# EAGLE board g - HomeAutomation (EAGLE 9.1.1)
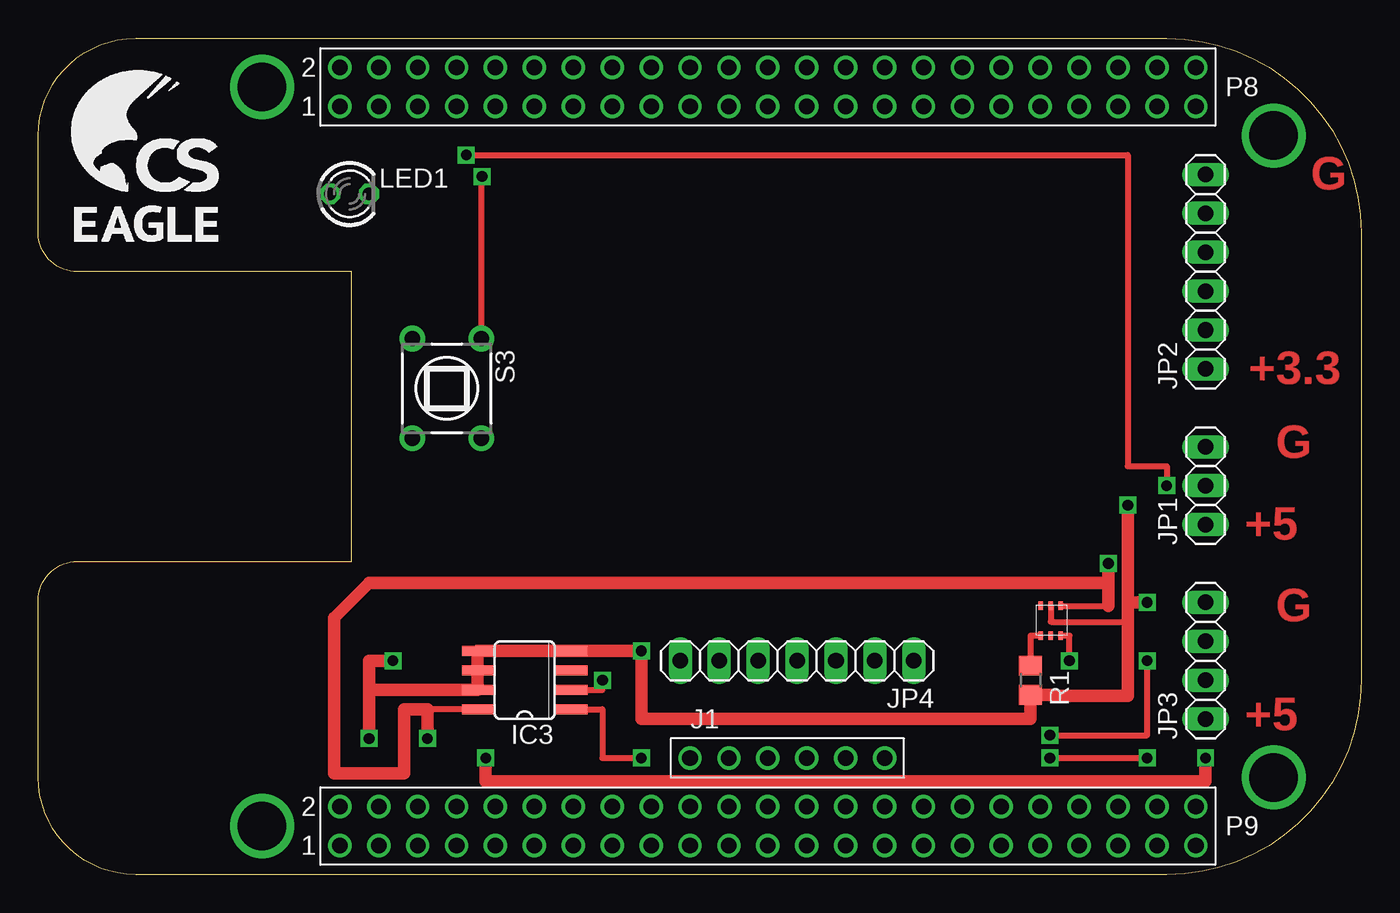
[diagram p0: board, top side]
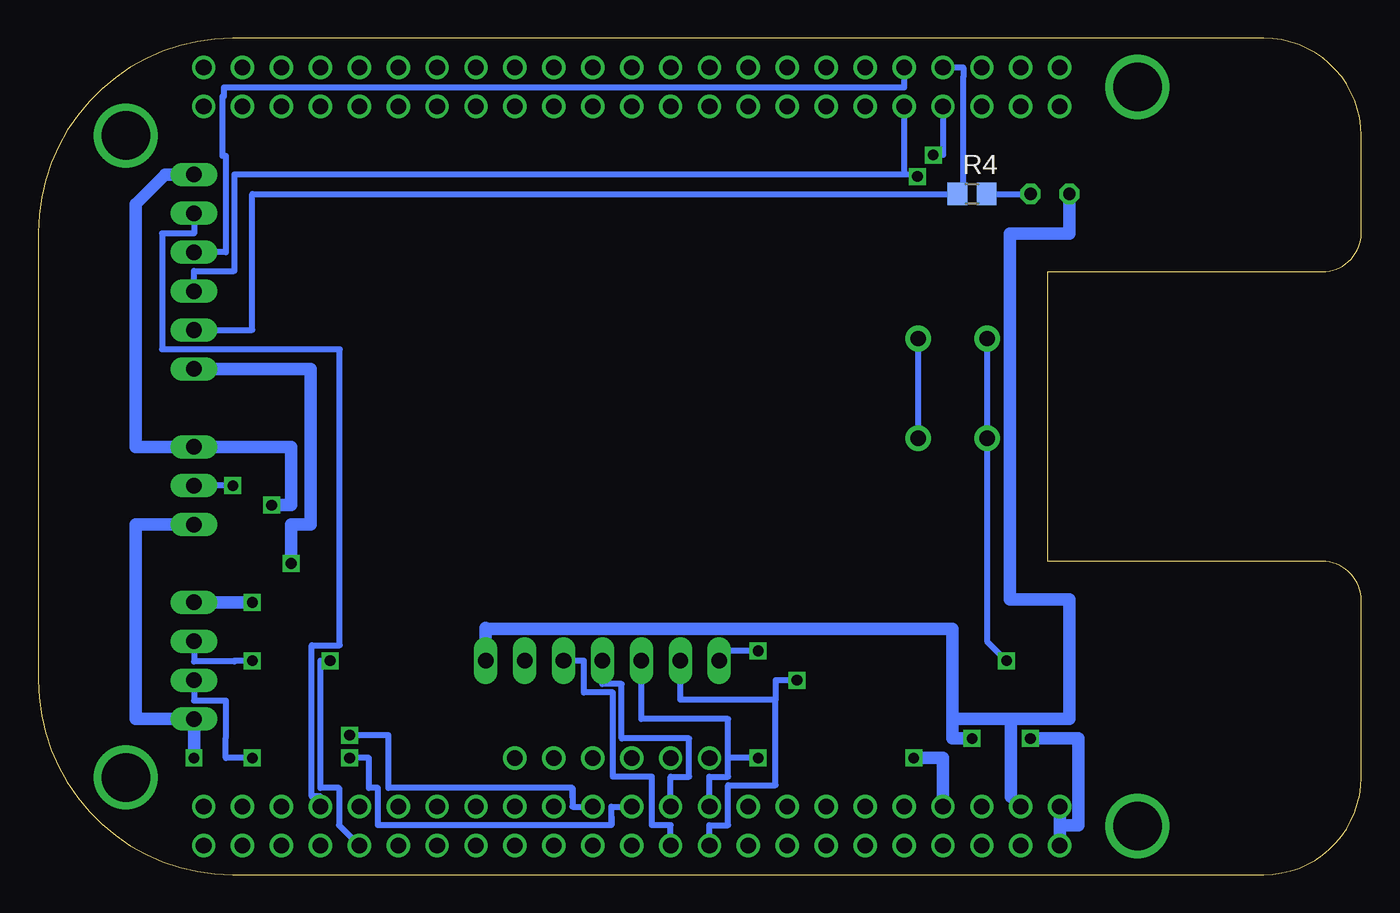
[diagram p1: board, bottom side, seen from below]

Size 86.36 x 54.61 mm. Coordinates in mm from the lower left corner, seen from the top.
Copper layers (1*16): Top 0.035mm / dielectric 1.5mm / Bottom 0.035mm
Design rules "default": minimum track width 6mil, minimum drill 0.35mm, track to track 6mil, track to pad 6mil, pad to pad 6mil, via to via 6mil, smd to smd 6mil, copper to edge 40mil, drill to drill 6mil, minimum pad ring 10mil, minimum via ring 8mil, stop-mask expansion 4mil, vias tented up to drill 0mil, thermal gap 10mil

## Footprints (pad centres in the part's own frame; a part is rotated, then mirrored left to right if it is on the bottom)
SO08 = smd 0.66 x 2.032: 1 -1.905,-3.073; 2 -0.635,-3.073; 3 0.635,-3.073; 4 1.905,-3.073; 5 1.905,3.073; 6 0.635,3.073; 7 -0.635,3.073; 8 -1.905,3.073
1X03 = drill 1.016 long: 1 -2.54,0; 2 0,0; 3 2.54,0
1X06 = drill 1.016 long: 1 -6.35,0; 2 -3.81,0; 3 -1.27,0; 4 1.27,0; 5 3.81,0; 6 6.35,0
1X04 = drill 1.016 long: 1 -3.81,0; 2 -1.27,0; 3 1.27,0; 4 3.81,0
1X07 = drill 1.016 long: 1 -7.62,0; 2 -5.08,0; 3 -2.54,0; 4 0,0; 5 2.54,0; 6 5.08,0; 7 7.62,0
LED3MM = drill 0.813 octagon: A -1.27,0; K 1.27,0
BEAGLEBONE_BLACK_CAPE = drill 3.175: H1 14.605,3.175; H2 80.645,6.35; H3 80.645,48.26; H4 14.605,51.435 | drill 1.016: J1.1 42.545,7.62; J1.2 45.085,7.62; J1.3 47.625,7.62; J1.4 50.165,7.62; J1.5 52.705,7.62; J1.6 55.245,7.62; P8.1 19.685,50.165; P8.2 19.685,52.705; P8.3 22.225,50.165; P8.4 22.225,52.705; P8.5 24.765,50.165; P8.6 24.765,52.705; P8.7 27.305,50.165; P8.8 27.305,52.705; P8.9 29.845,50.165; P8.10 29.845,52.705; P8.11 32.385,50.165; P8.12 32.385,52.705; P8.13 34.925,50.165; P8.14 34.925,52.705; P8.15 37.465,50.165; P8.16 37.465,52.705; P8.17 40.005,50.165; P8.18 40.005,52.705; P8.19 42.545,50.165; P8.20 42.545,52.705; P8.21 45.085,50.165; P8.22 45.085,52.705; P8.23 47.625,50.165; P8.24 47.625,52.705; P8.25 50.165,50.165; P8.26 50.165,52.705; P8.27 52.705,50.165; P8.28 52.705,52.705; P8.29 55.245,50.165; P8.30 55.245,52.705; P8.31 57.785,50.165; P8.32 57.785,52.705; P8.33 60.325,50.165; P8.34 60.325,52.705; P8.35 62.865,50.165; P8.36 62.865,52.705; P8.37 65.405,50.165; P8.38 65.405,52.705; P8.39 67.945,50.165; P8.40 67.945,52.705; P8.41 70.485,50.165; P8.42 70.485,52.705; P8.43 73.025,50.165; P8.44 73.025,52.705; P8.45 75.565,50.165; P8.46 75.565,52.705; P9.1 19.685,1.905; P9.2 19.685,4.445; P9.3 22.225,1.905; P9.4 22.225,4.445; P9.5 24.765,1.905; P9.6 24.765,4.445; P9.7 27.305,1.905; P9.8 27.305,4.445; P9.9 29.845,1.905; P9.10 29.845,4.445; P9.11 32.385,1.905; P9.12 32.385,4.445; P9.13 34.925,1.905; P9.14 34.925,4.445; P9.15 37.465,1.905; P9.16 37.465,4.445; P9.17 40.005,1.905; P9.18 40.005,4.445; P9.19 42.545,1.905; P9.20 42.545,4.445; P9.21 45.085,1.905; P9.22 45.085,4.445; P9.23 47.625,1.905; P9.24 47.625,4.445; P9.25 50.165,1.905; P9.26 50.165,4.445; P9.27 52.705,1.905; P9.28 52.705,4.445; P9.29 55.245,1.905; P9.30 55.245,4.445; P9.31 57.785,1.905; P9.32 57.785,4.445; P9.33 60.325,1.905; P9.34 60.325,4.445; P9.35 62.865,1.905; P9.36 62.865,4.445; P9.37 65.405,1.905; P9.38 65.405,4.445; P9.39 67.945,1.905; P9.40 67.945,4.445; P9.41 70.485,1.905; P9.42 70.485,4.445; P9.43 73.025,1.905; P9.44 73.025,4.445; P9.45 75.565,1.905; P9.46 75.565,4.445
R0805 = smd 1.3 x 1.5: 1 -0.95,0; 2 0.95,0
TL1105SP = drill 1 pad 1.676: 1 -2.25,-3.25; 2 -2.25,3.25; 3 2.25,-3.25; 4 2.25,3.25
ODFN6 = smd 0.55 x 0.3: P$1 -1.046,0.7; P$2 -1.046,0.05; P$3 -1.046,-0.6; P$4 0.904,-0.6; P$5 0.904,0.05; P$6 0.904,0.7

## Placement (x,y rotation side)
IC3  DS1621S  [SO08]  31.75,12.7 90 top
JP1  [1X03]  76.2,25.4 90 top
JP2  [1X06]  76.2,39.37 90 top
JP3  [1X04]  76.2,13.97 90 top
JP4  [1X07]  49.53,13.97 180 top
LED1  [LED3MM]  20.32,44.45 0 top
PCB1  BEAGLEBONE_BLACK_CAPE  [BEAGLEBONE_BLACK_CAPE]  0,0 0 top
R1  100k  [R0805]  64.77,12.7 270 top
R4  86  [R0805]  25.4,44.45 0 bottom
S3  [TL1105SP]  26.67,31.75 180 top
U$1  ISL29101  [ODFN6]  66.04,16.51 270 top

## Library data of the parts
IC3 = maxim
JP1-JP4 = pinhead
LED1 S3 = SouthernConn
PCB1 = e14_BeagleBoneBlack_RevB
R1 = rclb; SPICEPREFIX: R
R4 = rcl
U$1 = mdant

## Nets
+3V3: IC3.8 JP2.1 JP4.1 LED1.A PCB1.P9.4 U$1.P$1
+5V: JP1.1 JP3.1 PCB1.P9.8
AIN1: JP2.5 PCB1.P9.40
AIN2: PCB1.P9.37 U$1.P$6
GND: IC3.4 IC3.5 IC3.6 IC3.7 JP1.3 JP2.6 JP3.4 JP4.7 PCB1.P9.1 PCB1.P9.2 R1.2 S3.3 S3.4 U$1.P$2
GPIO0_66: JP1.2 PCB1.P8.7
GPIO0_67: JP2.2 PCB1.P8.8 R4.1
GPIO0_68: JP2.4 PCB1.P8.10
GPIO0_69: JP2.3 PCB1.P8.9 S3.1 S3.2
I2C2_SCL: IC3.2 JP4.6 PCB1.P9.19
I2C2_SDA: IC3.1 JP4.5 PCB1.P9.20
N$1: R1.1 U$1.P$4
N$13: LED1.K R4.2
SPI0_CS0: JP4.2
SPIO_CS0: PCB1.P9.17
SPIO_D0: JP4.3 PCB1.P9.21
SPIO_SCLK: JP4.4 PCB1.P9.22
UART1_RXD: JP3.3 PCB1.P9.26
UART1_TXD: JP3.2 PCB1.P9.24

## Tracks (layer width: path | path; a pad name or v marks a point on that pad's centre or on a via)
+3V3  (via drill 0.7)
  Top 0.406: IC3.8 25.4,10.79 | U$1.P$1 69.85,17.56
  Top 0.813: 69.85,19.05 21.59,19.05 19.31,16.77 19.31,6.61 23.87,6.61 23.87,10.79 25.4,10.79 v25.4,8.89 | 69.85,19.05 v69.85,20.32 | 69.85,17.56 69.85,19.05
  Bottom 0.813: 22.86,10.16 19.05,10.16 19.05,17.96 22.94,17.96 22.94,41.86 19.05,41.86 LED1.A | 22.86,10.16 26.67,10.16 | v69.85,20.32 69.85,22.86 68.58,22.86 68.58,33.02 JP2.1 | 26.67,10.16 26.67,16.05 57.1,16.05 57.15,16.1 JP4.1 | PCB1.P9.4 22.86,5.08 22.86,10.16 | 26.67,10.16 26.67,8.89 v25.4,8.89
+5V  (via drill 0.7)
  Top 0.813: v29.21,7.62 29.21,6.1 76.2,6.1 v76.2,7.62
  Bottom 0.813: PCB1.P9.8 27.3,7.62 v29.21,7.62 | v76.2,7.62 JP3.1 80.01,10.16 80.01,17.78 80.01,22.86 JP1.1
AIN1
  Bottom 0.406: JP2.5 76.2,41.86 78.28,41.86 78.28,34.29 68.58,34.29 67.94,34.29 66.67,34.29 66.67,14.98 68.5,14.98 68.5,5.11 67.94,5.11 PCB1.P9.40
AIN2  (via drill 0.7)
  Top 0.406: v67.31,13.97 67.31,15.61 U$1.P$6
  Bottom 0.406: v67.31,13.97 67.94,13.97 67.94,5.66 66.73,5.66 66.73,3.23 PCB1.P9.37
GND  (via drill 0.7)
  Top 0.406: 66.3,11.75 66.3,11.69 | U$1.P$2 66.09,16.51 71.12,16.51
  Top 0.813: v71.12,24.13 71.12,17.78 | 71.12,17.78 v72.39,17.78 | 66.3,11.75 R1.2 64.77,10.16 39.37,10.16 v39.37,14.61 IC3.4 IC3.5 IC3.6 IC3.7 21.59,12.06 | 66.3,11.69 71.12,11.69 71.12,16.51 71.12,17.78 | v21.59,8.89 21.59,12.06 | 21.59,12.06 21.59,13.97 v23.15,13.97
  Bottom 0.406: 78.09,45.72 78.09,45.71 | v39.37,14.61 41.91,14.61 JP4.7 | S3.3 S3.4 24.42,15.24 v23.15,13.97
  Bottom 0.813: JP2.6 78.09,45.72 | 78.09,45.71 80.01,43.79 80.01,27.94 JP1.3 69.85,27.94 69.85,24.13 v71.12,24.13 | v72.39,17.78 JP3.4 | PCB1.P9.1 19.68,3.23 | 19.68,3.23 18.47,3.23 18.47,8.89 v21.59,8.89 | 19.68,3.23 PCB1.P9.2
GPIO0_66  (via drill 0.7)
  Top 0.406: v27.94,46.99 71.12,46.99 71.12,26.67 73.66,26.67 v73.66,25.4
  Bottom 0.406: PCB1.P8.7 27.3,46.99 v27.94,46.99 | v73.66,25.4 JP1.2
GPIO0_67
  Bottom 0.406: R4.1 25.98,44.45 | 25.98,44.45 25.98,52.07 25.98,52.7 PCB1.P8.8 | JP2.2 72.39,35.56 72.39,44.45 25.98,44.45
GPIO0_68
  Bottom 0.406: PCB1.P8.10 29.84,51.38 74.24,51.38 74.24,50.8 74.35,50.8 74.35,46.94 74.12,46.94 74.12,40.64 JP2.4
GPIO0_69  (via drill 0.7)
  Top 0.406: v28.97,45.59 28.92,45.59 S3.1
  Bottom 0.406: PCB1.P8.9 29.84,45.72 | 29.84,45.72 40.64,45.72 73.56,45.72 73.56,39.42 76.2,39.42 JP2.3 | S3.2 S3.1 | v28.97,45.59 28.97,45.72 29.84,45.72
I2C2_SCL  (via drill 0.7)
  Top 0.406: IC3.2 36.83,12.06 v36.83,12.7
  Bottom 0.406: PCB1.P9.19 42.55,3.23 41.33,3.23 41.33,5.84 38.23,5.84 38.23,11.43 | 38.23,11.43 44.45,11.43 JP4.6 | v36.83,12.7 38.23,12.7 38.23,11.43
I2C2_SDA  (via drill 0.7)
  Top 0.406: IC3.1 36.83,10.79 36.83,7.62 v39.37,7.62
  Bottom 0.406: PCB1.P9.20 42.55,6.4 41.33,6.4 41.33,7.62 | 41.33,7.62 41.33,10.16 46.99,10.16 JP4.5 | v39.37,7.62 41.33,7.62
N$1
  Top 0.406: U$1.P$4 64.77,15.61 R1.1
N$13
  Bottom 0.406: R4.2 LED1.K
SPIO_D0
  Bottom 0.406: PCB1.P9.21 45.09,3.23 46.3,3.23 46.3,6.4 48.84,6.4 48.84,11.89 50.75,11.89 50.75,13.97 JP4.3
SPIO_SCLK
  Bottom 0.406: PCB1.P9.22 45.09,6.4 43.87,6.4 43.87,8.89 48.28,8.89 48.28,12.45 49.53,12.45 JP4.4
UART1_RXD  (via drill 0.7)
  Top 0.406: v66.04,9.11 72.39,9.11 v72.39,13.97
  Bottom 0.406: JP3.3 76.2,13.92 73.56,13.92 73.56,13.97 v72.39,13.97 | 51.49,5.66 51.49,5.08 | 51.49,5.08 51.49,4.45 PCB1.P9.26 | 51.49,5.08 51.49,5.66 | 51.49,5.66 63.5,5.66 63.5,9.11 v66.04,9.11
UART1_TXD  (via drill 0.7)
  Top 0.406: v66.04,7.62 v72.39,7.62
  Bottom 0.406: JP3.2 76.2,11.38 74.12,11.38 74.12,8.94 74.12,7.62 v72.39,7.62 | 48.95,3.23 48.95,3.81 | 48.95,3.81 48.95,4.45 PCB1.P9.24 | 48.95,3.81 48.95,3.23 | 48.95,3.23 64.19,3.23 64.19,5.66 64.77,5.66 64.77,7.62 v66.04,7.62

## Text on the board
Top: G | +3.3 | G | +5 | G | +5